# EAGLE board Buck (EAGLE 6.4)
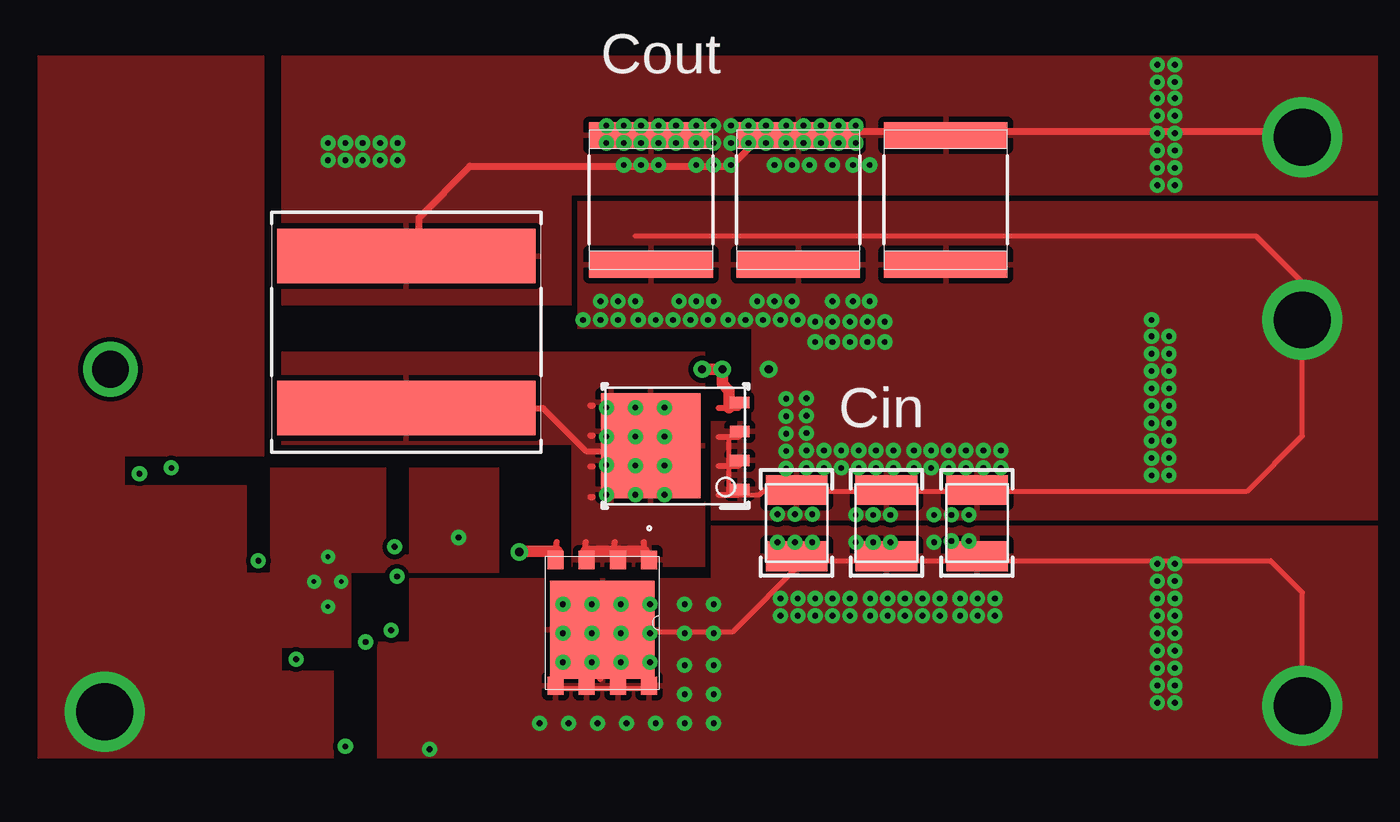
[diagram p0: board, top side]
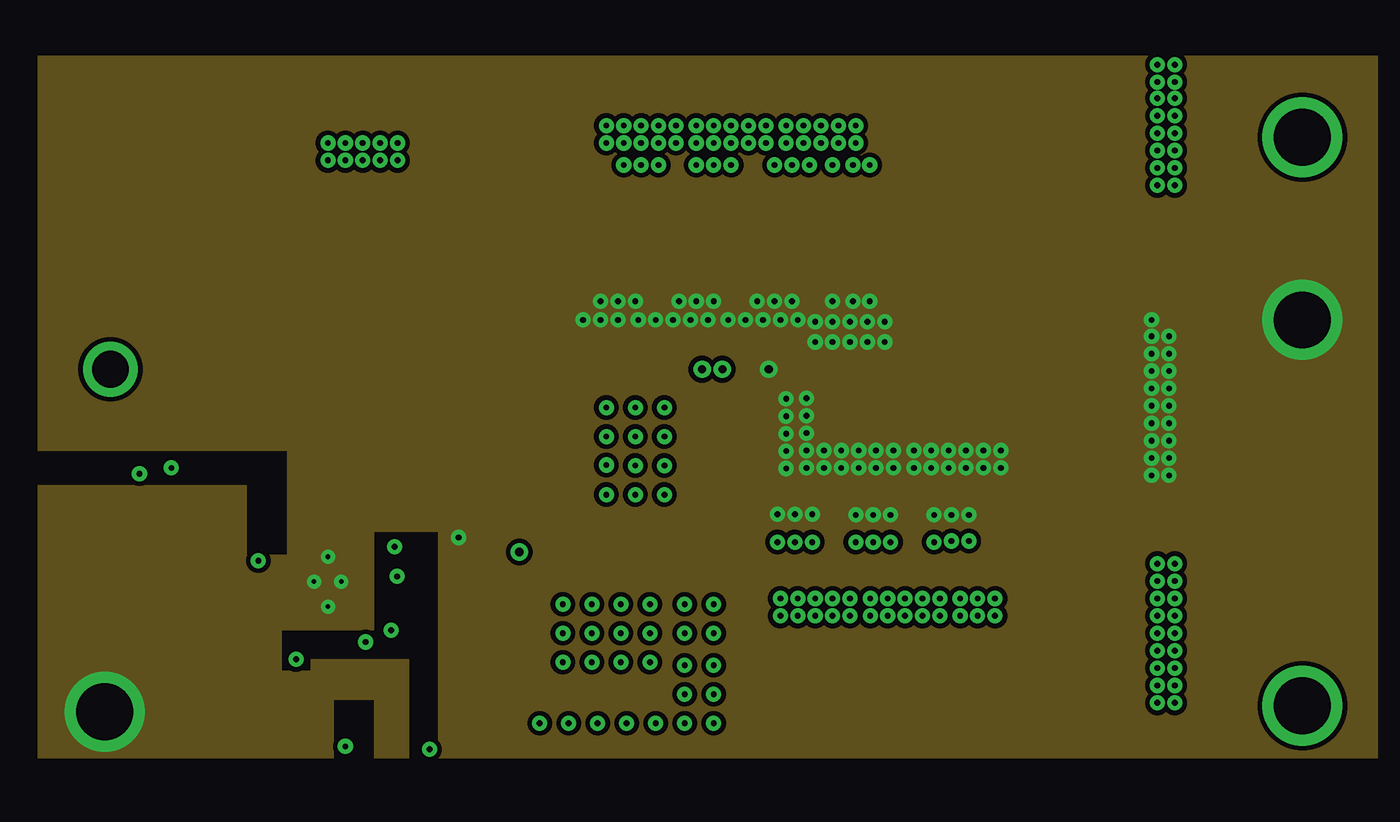
[diagram p1: board, inner layer INTERNAL1]
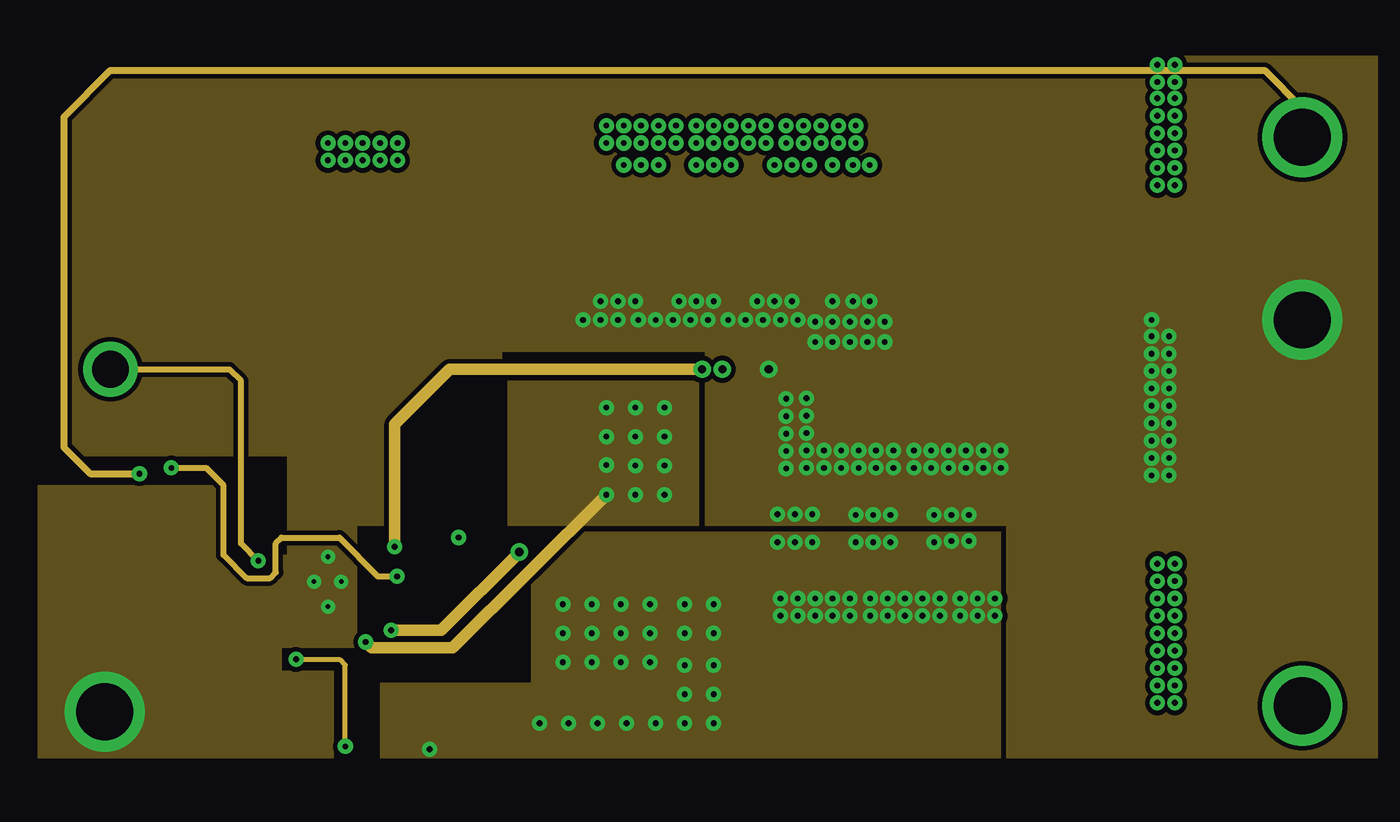
[diagram p2: board, inner layer INTERNAL2]
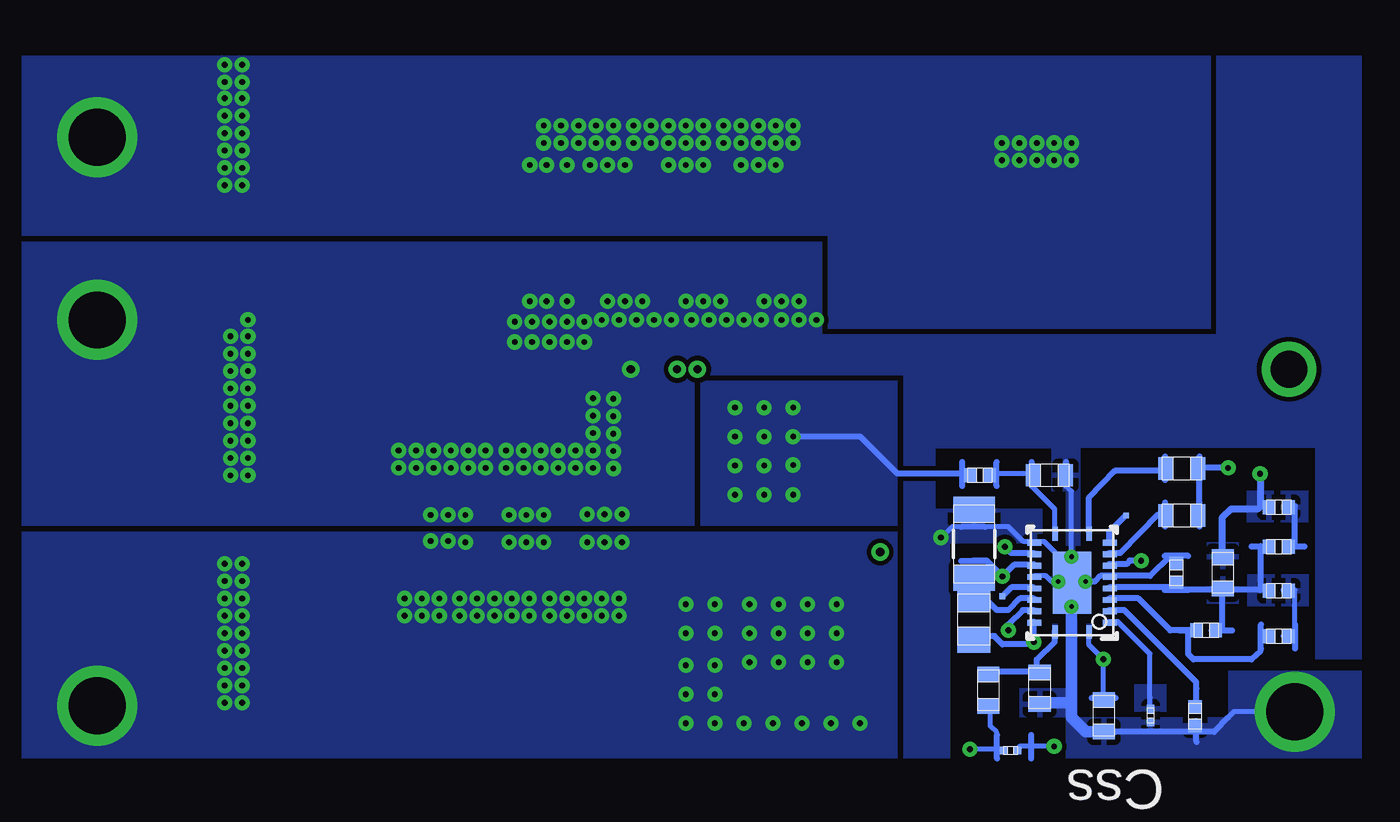
[diagram p3: board, bottom side, seen from below]

No outline drawn. Coordinates in mm, seen from the top.
Copper layers ((1*2)+(15*16)): TOP / INTERNAL1 / layer 15 / BOTTOM

## Footprints (pad centres in the part's own frame; a part is rotated, then mirrored left to right if it is on the bottom)
TP-1502 = drill 0.813 round: 1 0,0
0805 = smd 1.118 x 1.448: 1 -0.902,0; 2 0.902,0
0402 = smd 0.559 x 0.61: 1 -0.419,0; 2 0.419,0
0603 = smd 0.66 x 0.965: 1 -0.699,0; 2 0.699,0
1210 = smd 1.3 x 2.7: 1 -1.45,0; 2 1.45,0
2220_250 = smd 1.143 x 5.41: 1 -2.832,0; 2 2.832,0
1206 = smd 1.118 x 1.803: 1 -1.499,0; 2 1.499,0
XAL1010 = smd 2.388 x 11.303: 1 -3.327,0; 2 3.327,0
TRANS_NexFET_Q5A = smd 0.8 x 0.7: 1 -2.752,2.055; 2 -2.752,0.685; 3 -2.752,-0.685; 4 -2.752,-2.055; 5 2.752,-2.055; 6 2.752,-0.685; 7 2.752,0.685; 8 2.752,2.055 | smd 4.3 x 4.56: 9 0.3,0
TRANS_NexFET_Q5B = smd 0.86 x 0.51: 1 -2.82,1.905; 2 -2.82,0.635; 3 -2.82,-0.635; 4 -2.82,-1.905; 5 2.82,-1.905; 6 2.82,-0.635; 7 2.82,0.635; 8 2.82,1.905 | smd 4.34 x 4.6: 9 1.08,0
SMD_PAD1 = smd 0.254 x 0.254: 1 0,0
0201 = smd 0.356 x 0.33: 1 -0.292,0; 2 0.292,0
TP-5012 = drill 0.813 round: 1 0,0
RGY0020B = smd 0.25 x 0.6: 1 -0.75,2.15; 10 -0.75,-2.15; 11 0.75,-2.15; 20 0.75,2.15 | smd 0.6 x 0.25: 2 -1.65,1.75; 3 -1.65,1.25; 4 -1.65,0.75; 5 -1.65,0.25; 6 -1.65,-0.25; 7 -1.65,-0.75; 8 -1.65,-1.25; 9 -1.65,-1.75; 12 1.65,-1.75; 13 1.65,-1.25; 14 1.65,-0.75; 15 1.65,-0.25; 16 1.65,0.25; 17 1.65,0.75; 18 1.65,1.25; 19 1.65,1.75 | smd 1.7 x 2.7: 21 0,0

## Placement (x,y rotation side)
AGND  [TP-1502]  29.06,28.17 0 top
Cboot  [0805]  43.13,32.23 270 bottom
Ccomp1  [0402]  29.79,31.5 0 bottom
Ccomp2  [0402]  32.97,31.75 0 bottom
Ccomp3  [0402]  29.79,35.41 180 bottom
Cilim  [0603]  39.83,38.53 180 bottom
Cin_1  [1210]  59.39,36.45 90 top
Cin_2  [1210]  63.32,36.45 90 top
Cin_3  [1210]  67.28,36.45 90 top
Cout_1  [2220_250]  53.01,50.6 270 top
Cout_2  [2220_250]  59.46,50.6 270 top
Cout_3  [2220_250]  65.91,50.6 270 top
Css_1  [0402]  33.45,27.99 270 bottom
Css_2  [0402]  33.45,27.99 270 bottom
Cvcc  [1206]  43.13,35.53 90 bottom
Cvin  [0603]  40.26,29.21 270 bottom
L1  [XAL1010]  42.29,44.81 270 top
M1  [TRANS_NexFET_Q5A]  50.88,32.08 270 top
M2  [TRANS_NexFET_Q5B]  54.08,39.83 180 top
NC1  [SMD_PAD1]  36.47,36.78 90 bottom
NC2  [SMD_PAD1]  41.88,33.25 90 bottom
PGND  [TP-1502]  81.51,45.34 0 top
Rcomp1  [0402]  29.79,33.48 180 bottom
Rcomp2  [0402]  29.79,37.13 0 bottom
Rfbb  [0402]  34.26,34.26 270 bottom
Rfbt  [0603]  32.23,34.26 270 bottom
Rilim  [0402]  42.88,38.53 0 bottom
Rpgood  [0603]  34.04,38.84 180 bottom
Rt  [0201]  35.41,28.02 270 bottom
Ruv1  [0201]  41.53,26.49 0 bottom
Ruv2  [0603]  37.44,28.02 270 bottom
Rvcc  [0603]  34.04,36.78 0 bottom
Rvin  [0603]  42.49,29.13 90 bottom
SYNCOUT  [TP-5012]  29.34,43.15 0 top
U1  [RGY0020B]  38.84,33.83 180 bottom
VIN  [TP-1502]  81.51,28.45 0 top
VOUT  [TP-1502]  81.51,53.34 0 top

## Library data of the parts
AGND = ultra-librarian; RefDes: AGND; Type: TP-1502
Cboot = ultra-librarian; RefDes: Cboot; Type: 08053C104KAT2A
Ccomp1 = ultra-librarian; RefDes: Ccomp1; Type: GRM155R71C123KA01D
Ccomp2 = ultra-librarian; RefDes: Ccomp2; Type: GRM1555C1H1R0CA01D
Ccomp3 = ultra-librarian; RefDes: Ccomp3; Type: GRM1555C1H561JA01J
Cilim = ultra-librarian; RefDes: Cilim; Type: GRM1885C2A160JA01D
Cin_1-Cin_3 Cout_1-Cout_3 Css_1 Css_2 = ultra-librarian
Cvcc = ultra-librarian; RefDes: Cvcc; Type: 12063D225KAT2A
Cvin = ultra-librarian; RefDes: Cvin; Type: GRM188R72A104KA35D
L1 = ultra-librarian; RefDes: L1; Type: XAL1010-152MEB
M1 = ultra-librarian; RefDes: M1; Type: CSD18513Q5A
M2 = ultra-librarian; RefDes: M2; Type: CSD18512Q5B
NC1 = ultra-librarian; RefDes: NC1; Type: SMD_TP
NC2 = ultra-librarian; RefDes: NC2; Type: SMD_TP
PGND = ultra-librarian; RefDes: PGND; Type: TP-5012
Rcomp1 = ultra-librarian; RefDes: Rcomp1; Type: CRCW04028K66FKED
Rcomp2 = ultra-librarian; RefDes: Rcomp2; Type: CRCW04021K74FKED
Rfbb = ultra-librarian; RefDes: Rfbb; Type: CRCW04023K40FKED
Rfbt = ultra-librarian; RefDes: Rfbt; Type: RC0603FR-0718KL
Rilim = ultra-librarian; RefDes: Rilim; Type: CRCW0402365RFKED
Rpgood = ultra-librarian; RefDes: Rpgood; Type: RC0603FR-0720KL
Rt = ultra-librarian; RefDes: Rt; Type: RC0201FR-0728K7L
Ruv1 = ultra-librarian; RefDes: Ruv1; Type: RC0201FR-07105KL
Ruv2 = ultra-librarian; RefDes: Ruv2; Type: RC0603FR-077K5L
Rvcc = ultra-librarian; RefDes: Rvcc; Type: RC0603FR-0720KL
Rvin = ultra-librarian; RefDes: Rvin; Type: CRCW06032R10FKEA
SYNCOUT = ultra-librarian; RefDes: SYNCOUT; Type: TP-5012
U1 = ultra-librarian; RefDes: U1; Type: LM25145RGYR
VIN = ultra-librarian; RefDes: VIN; Type: TP-1502
VOUT = ultra-librarian; RefDes: VOUT; Type: TP-1502

## Nets
0: AGND.1 Cilim.1 Cin_1.2 Cin_2.2 Cin_3.2 Cout_1.2 Cout_2.2 Cout_3.2 Css_1.2 Css_2.2 Cvcc.2 Cvin.2 M2.1 M2.2 M2.3 PGND.1 Rfbb.1 Rt.2 Ruv2.2 U1.6 U1.12 U1.15 U1.21
1: Cvcc.1 Rpgood.1 Rvcc.2 U1.14
2: Cout_1.1 Cout_2.1 Cout_3.1 L1.1 Rcomp2.1 Rfbt.1 VOUT.1
3: Cin_1.1 Cin_2.1 Cin_3.1 M1.5 M1.6 M1.7 M1.8 M1.9 Ruv1.1 Rvin.1 VIN.1
4: Ruv1.2 Ruv2.1 U1.1
7: Css_1.1 Css_2.1 U1.3
8: Cvin.1 Rvin.2 U1.20
10: Ccomp1.1 Ccomp2.1 U1.4
11: Ccomp2.2 Ccomp3.2 Rcomp1.2 Rfbb.2 Rfbt.2 U1.5
13: Cilim.2 Rilim.2 U1.11
16: Cboot.2 L1.2 M1.1 M1.2 M1.3 M2.5 M2.6 M2.7 M2.8 M2.9 Rilim.1 U1.19
17: Ccomp1.2 Rcomp1.1
18: Ccomp3.1 Rcomp2.2
19: Rvcc.1 U1.8
21: NC2.1 U1.16
22: NC1.1 U1.9
26: Rt.1 U1.2
27: Cboot.1 U1.17
35: M1.4 U1.18
36: M2.4 U1.13
37: SYNCOUT.1 U1.7
38: Rpgood.2 U1.10

## Tracks (layer width: path | path; a pad name or v marks a point on that pad's centre or on a via)
0  (via drill 0.2 pad 0.48, 0.25 pad 0.56, 0.36 pad 0.66, 2.49 pad 3.48)
  TOP 0.229: 52.32,49.02 79.5,49.02 81.53,46.99 v81.53,45.34 81.53,40.26 79.12,37.85 60.2,37.85 57.91,37.85 57.76,37.69 56.41,37.69 56.41,38.96 56.41,40.23
  TOP 0.254: 55.98,37.68 56.82,37.68 | 55.98,38.95 56.82,38.95 | 55.98,40.22 56.82,40.22
  BOTTOM 0.229: 32,27.94 31.75,28.19 v29.08,28.19 | 38.86,34.44 v38.86,34.98 38.86,37.85 39.12,38.1 39.12,38.61 | 38.86,34.44 38.86,33.88 v38.86,32.79 | v44.58,35.81 44.07,36.3 43.18,36.3 41.63,36.3 40.97,35.64 40.51,35.64 40.06,35.64 38.86,34.44 | 40.51,34.14 39.98,34.14 39.73,33.88 v39.45,33.88 | 33.4,27.81
  BOTTOM 0.254: 37.44,27.3 33.4,27.3 32.61,27.3 32,27.94 | 34.29,35.03 34.54,35.03 35.43,34.14 37.21,34.14 37.59,34.14 37.85,33.88 v38.25,33.88 | 39.1,38.08 39.1,39.12 | 42.65,36.28 43.69,36.28 | 33.39,26.87 33.39,27.71 | 33.76,35.01 34.8,35.01 | 36.93,27.29 37.97,27.29
  BOTTOM 0.508: 37.44,27.3 38.23,27.3 38.86,27.94 38.86,28.7 | 40.39,28.57 38.96,28.57 38.86,28.7 | 38.86,28.7 v38.86,32.79
  other vias: 74.93,45.34 58.17,43.18 75.69,42.34 74.93,42.34 74.93,41.58 74.93,40.82 74.93,40.06 75.69,41.58 75.69,40.82 75.69,40.06 74.93,43.1 75.69,43.1 60.96,46.15 51.56,45.34 50.8,45.34 50.04,45.34 52.45,45.34 55.5,45.34 54.74,45.34 53.98,45.34 53.21,45.34 56.39,45.34 59.44,45.34 58.67,45.34 57.91,45.34 57.15,45.34 60.07,36.83 59.31,36.83 58.55,36.83 62.59,46.15 61.85,46.15 59.18,46.15 57.66,46.15 58.42,46.15 55.75,46.15 54.23,46.15 54.99,46.15 52.32,46.15 51.56,46.15 61.98,36.8 58.93,41.88 59.82,41.91 58.93,38.84 58.93,39.6 58.93,40.36 59.82,38.86 59.82,39.62 59.82,40.39 59.82,41.15 62.74,36.8 63.5,36.8 65.41,36.8 66.17,36.8 66.93,36.8 58.93,41.12 50.8,46.15 60.96,45.26 60.96,44.37 61.72,44.37 62.48,44.37 63.25,44.37 61.72,45.26 62.48,45.26 63.25,45.26 60.2,44.37 60.2,45.26 68.33,39.62 68.33,38.86 64.52,39.62 64.52,38.86 67.56,39.62 66.8,39.62 66.04,39.62 67.56,38.86 66.8,38.86 66.04,38.86 65.28,38.86 65.28,39.62 60.58,39.62 60.58,38.86 63.63,39.62 62.87,39.62 62.1,39.62 63.63,38.86 62.87,38.86 62.1,38.86 61.34,38.86 61.34,39.62 75.69,39.29 74.93,39.29 74.93,38.53 75.69,38.53 74.93,44.63 74.93,43.87 75.69,44.63 75.69,43.87
  pour TOP (rank 6): 26.16,56.9 36.07,56.9 36.07,39.37 29.97,39.37 29.97,38.1 32.51,38.1 35.31,38.1 35.31,34.26 36.32,34.26 36.32,38.86 41.4,38.86 41.4,35.05 42.42,35.05 42.42,38.86 46.35,38.86 46.35,34.26 39.88,34.26 39.88,30.99 36.83,30.99 36.83,29.97 39.12,29.97 39.12,26.16 26.16,26.16
  pour TOP: 49.78,50.55 49.78,44.96 57.4,44.96 57.4,40.89 55.63,40.89 55.63,36.58 84.84,36.58 84.84,50.55
  pour BOTTOM (rank 5): 40.21,35.51 40.21,35.74 40.79,35.74 40.79,35.51
  pour BOTTOM (rank 6): 40.21,34.01 40.21,34.24 40.79,34.24 40.79,34.01
  pour BOTTOM (rank 6): 36.91,34.01 36.91,34.24 37.49,34.24 37.49,34.01
  pour BOTTOM (rank 6): 46.23,26.16 44.2,26.16 44.2,35.56 41.15,35.56 40.13,35.56 40.13,37.08 44.83,37.08 44.83,39.73 39.75,39.73 39.75,37.85 39.12,37.85 39.12,35.31 39.75,35.31 39.75,32.51 37.97,32.51 37.97,35.31 38.48,35.31 38.48,39.75 28.19,39.75 28.19,30.48 26.16,30.48 26.16,56.9 32.51,56.9 32.51,44.7 49.78,44.7 49.78,48.77 84.84,48.77 84.84,36.32 55.37,36.32 55.37,42.93 46.23,42.93
  pour BOTTOM (rank 6): 38.61,27.94 38.61,32.38 39.12,32.38 39.12,29.21 41.15,29.21 41.15,27.94 39.12,27.94 39.12,26.16 26.16,26.16 26.16,29.97 32,29.97 32,27.94
  pour INTERNAL1 (rank 6): 77.47,26.16 43.69,26.16 43.69,36.07 40.89,36.07 40.89,31.75 36.83,31.75 36.83,29.97 38.1,29.97 38.1,30.48 42.42,30.48 42.42,26.16 40.89,26.16 40.89,28.7 39.12,28.7 39.12,26.16 26.16,26.16 26.16,38.1 35.31,38.1 35.31,35.05 37.08,35.05 37.08,39.62 26.16,39.62 26.16,56.9 84.84,56.9 84.84,26.16
  pour INTERNAL2 (rank 6): 26.16,56.9 84.84,56.9 84.84,26.16 68.58,26.16 68.58,36.32 55.37,36.32 55.37,43.94 46.48,43.94 46.48,36.32 40.13,36.32 40.13,30.99 36.83,30.99 36.83,29.97 39.12,29.97 39.12,26.16 26.16,26.16 26.16,38.1 34.8,38.1 34.8,35.05 37.08,35.05 37.08,39.37 26.16,39.37
1  (via drill 0.25 pad 0.56)
  INTERNAL2 0.254: v32,38.86 33.53,38.86 34.29,38.1 34.29,35.05 35.31,34.04 36.32,34.04 36.58,34.29 36.58,35.56 36.83,35.81 39.37,35.81 41.05,34.11 v41.88,34.11 41.96,34.11
  BOTTOM 0.254: v32,38.86 | v32,38.86 33.27,38.86 33.27,36.83 | 43.18,34.8 42.57,34.8 v41.88,34.11 41.38,34.62 40.51,34.62 40.51,34.65 | 33.26,36.3 33.26,37.34 | 33.26,38.33 33.26,39.37 | 42.65,34.78 43.69,34.78
  pour BOTTOM: 40.21,34.52 40.21,34.75 40.79,34.75 40.79,34.52
2  (via drill 0.25 pad 0.56, 2.49 pad 3.48)
  TOP 0.305: 42.85,48.13 42.85,49.81 45.09,52.07 52.32,52.07 54.99,52.07 56.52,52.07 58.04,53.59 59.69,53.59 61.21,53.59 81.28,53.59 v81.53,53.34
  INTERNAL2 0.305: 81.53,51.82 v81.53,53.34 81.53,54.61 79.88,56.26 29.34,56.26 27.3,54.23 27.3,39.75 28.45,38.61 v30.61,38.61
  BOTTOM 0.305: 32.26,35.03 32.26,36.7 31.88,37.06 30.71,37.06 30.58,37.19 30.58,38.58
  other vias: 38.86,53.09 38.86,52.32 41.91,53.09 41.15,53.09 40.39,53.09 41.91,52.32 41.15,52.32 40.39,52.32 39.62,52.32 39.62,53.09 75.95,52.76 75.18,52.76 75.95,56.52 75.95,51.23 75.18,56.52 75.18,51.99 75.95,51.99 60.96,52.12 62.59,52.12 61.85,52.12 59.94,52.12 59.18,52.12 58.42,52.12 51.82,52.12 52.58,52.12 53.34,52.12 54.99,52.12 56.52,52.12 55.75,52.12 75.18,55.04 75.18,54.28 75.18,53.52 75.95,55.04 75.95,54.28 75.95,53.52 75.18,55.75 75.95,55.75 51.82,53.85 51.82,53.09 52.58,53.09 53.34,53.09 54.1,53.09 52.58,53.85 53.34,53.85 54.1,53.85 51.05,53.09 51.05,53.85 55.75,53.85 55.75,53.09 56.52,53.09 57.28,53.09 58.04,53.09 56.52,53.85 57.28,53.85 58.04,53.85 54.99,53.09 54.99,53.85 59.69,53.85 59.69,53.09 60.45,53.09 61.21,53.09 61.98,53.09 60.45,53.85 61.21,53.85 61.98,53.85 58.93,53.09 58.93,53.85 75.18,51.23
  pour TOP (rank 5): 36.83,56.9 84.84,56.9 84.84,50.8 49.53,50.8 49.53,45.97 36.83,45.97
  pour BOTTOM (rank 3): 30,36.47 30,37.87 31.19,37.87 31.19,36.47
  pour BOTTOM (rank 3): 31.55,34.42 31.55,35.61 32.94,35.61 32.94,34.42
  pour BOTTOM (rank 5): 49.53,44.96 32.77,44.96 32.77,56.9 84.84,56.9 84.84,49.02 49.53,49.02
3  (via drill 0.25 pad 0.56, 2.49 pad 3.48)
  TOP 0.229: 50.8,31.7 56.59,31.7 59.69,34.8 60.2,34.8 80.14,34.8 81.53,33.4 v81.53,28.45 | 52.78,29.21 51.46,29.21 50.11,29.21 48.79,29.21
  TOP 0.254: 50.79,29.62 50.79,33.76 | 48.78,29.13 48.78,29.26 | 50.1,29.13 50.1,29.26 | 51.45,29.13 51.45,29.26 | 52.77,29.13 52.77,29.26
  BOTTOM 0.229: v43.31,26.54 42.14,26.54 42.14,26.67 42.14,27.28 42.42,27.56 42.42,28.57 | v43.31,26.54
  BOTTOM 0.254: 42.13,26.14 42.13,27.18
  other vias: 51.69,31.62 52.96,31.62 54.48,31.62 75.18,28.57 75.95,28.57 75.95,34.67 75.18,34.67 75.95,31.62 75.95,32.38 75.95,33.15 75.18,31.62 75.18,32.38 75.18,33.15 75.18,33.91 75.95,33.91 50.42,32.89 52.96,32.89 51.69,32.89 49.15,32.89 50.42,31.62 52.96,30.35 51.69,30.35 50.42,30.35 49.15,30.35 49.15,31.62 61.98,35.61 66.17,35.66 59.31,35.61 63.5,35.61 62.74,35.61 66.93,35.66 65.41,35.61 58.55,35.61 60.07,35.61 75.95,30.1 75.18,30.1 75.18,29.34 75.95,29.34 75.18,30.86 75.95,30.86 59.44,33.15 59.44,32.38 60.2,32.38 60.96,32.38 61.72,32.38 60.2,33.15 60.96,33.15 61.72,33.15 58.67,32.38 58.67,33.15 63.37,33.15 63.37,32.38 64.14,32.38 64.9,32.38 65.66,32.38 64.14,33.15 64.9,33.15 65.66,33.15 62.61,32.38 62.61,33.15 67.31,33.15 67.31,32.38 68.07,32.38 68.07,33.15 66.55,32.38 66.55,33.15 54.48,27.69 55.75,27.69 54.48,32.89 54.48,30.23 54.48,28.96 55.75,28.96 55.75,32.89 55.75,30.23 55.75,31.62 53.21,27.69 49.4,27.69 51.94,27.69 50.67,27.69 48.13,27.69
  pour TOP (rank 5): 84.84,26.16 41.02,26.16 41.02,31.24 42.42,31.24 42.42,34.04 55.63,34.04 55.63,36.32 84.84,36.32
  pour BOTTOM (rank 5): 84.84,26.16 46.48,26.16 46.48,36.07 84.84,36.07
  pour INTERNAL2 (rank 4): 68.33,26.16 41.15,26.16 41.15,29.46 47.75,29.46 47.75,36.07 68.33,36.07
4  (via drill 0.25 pad 0.56)
  INTERNAL2 0.229: 39.62,26.54 v39.62,26.67 39.62,30.23 39.37,30.48 v37.47,30.48
  BOTTOM 0.229: 41.15,26.67 40.64,26.67 v39.62,26.67 | v39.62,26.67 | 37.47,28.8 v37.47,30.48 38.1,31.11 38.1,31.73
  BOTTOM 0.254: 40.63,26.14 40.63,27.18 | 36.93,28.79 37.97,28.79
  pour BOTTOM (rank 3): 37.97,31.45 37.97,32.03 38.2,32.03 38.2,31.45
7
  BOTTOM 0.254: 33.4,28.8 33.4,29.49 36.55,32.64 37.21,32.64 | 33.39,28.37 33.39,29.21
  pour BOTTOM (rank 3): 36.91,32.51 36.91,32.74 37.49,32.74 37.49,32.51
8
  BOTTOM 0.254: 42.42,29.95 | 39.6,31.73 39.6,31.24 40.39,30.48 40.39,30.07 40.39,29.95 42.42,29.95
  pour BOTTOM (rank 2): 39.47,31.45 39.47,32.03 39.7,32.03 39.7,31.45
10
  BOTTOM 0.254: 33.27,31.75 33.76,31.75 | 33.76,31.75 34.54,31.75 35.94,33.15 37.21,33.15 | 33.76,31.75 33.76,30.71 33.53,30.48 30.99,30.48 30.58,30.86 30.58,31.5 | 33.33,31.74 34.16,31.74 | 30.57,30.96 30.57,32
  pour BOTTOM (rank 2): 36.91,33.02 36.91,33.25 37.49,33.25 37.49,33.02
11
  BOTTOM 0.254: 32.74,31.75 32.26,31.75 32.26,33.53 | 32.26,33.53 34.29,33.53 34.39,33.63 37.21,33.63 | 32.26,33.53 | 32.26,33.53 30.61,33.53 30.58,33.53 30.58,35.43 | 30.15,35.42 30.99,35.42 | 31.83,31.74 32.66,31.74 | 33.76,33.52 34.8,33.52
  pour BOTTOM (rank 2): 36.91,33.5 36.91,33.73 37.49,33.73 37.49,33.5
  pour BOTTOM (rank 3): 31.55,32.92 31.55,34.11 32.94,34.11 32.94,32.92
  pour BOTTOM (rank 4): 29.97,32.82 29.97,34.21 31.17,34.21 31.17,32.82
13
  BOTTOM 0.229: 42.16,38.61 | 42.16,38.61 40.62,38.61 40.62,38.08 39.6,37.06 39.6,36.04
  BOTTOM 0.254: 40.6,38.08 40.6,39.12 | 42.15,38.08 42.15,39.12
  pour BOTTOM: 39.47,35.74 39.47,36.32 39.7,36.32 39.7,35.74
16  (via drill 0.25 pad 0.56)
  TOP 0.254: 42.85,41.48 48.28,41.48 50.16,39.6 52.91,39.6 | 50.83,39.59 54.97,39.59 | 50.34,41.59 50.47,41.59 | 50.34,40.27 50.47,40.27 | 50.34,38.92 50.47,38.92 | 50.34,37.58 50.47,37.58 | 52.69,34.77 52.69,35.61 | 51.42,34.77 51.42,35.61 | 50.15,34.77 50.15,35.61
  TOP 0.508: 52.7,35.2 51.44,35.2 50.16,35.2
  INTERNAL2 0.508: v51.05,37.69 44.32,30.99 40.77,30.99 v40.51,31.24
  BOTTOM 0.254: 43.66,38.61 46.48,38.61 48.11,40.23 v51.05,40.23 51.18,40.23 | v40.51,31.24 40.51,32.13 | v40.51,31.24 | v40.51,31.24 40.62,31.14 41.88,31.14 42.24,31.5 43.18,31.5 | 42.65,31.48 43.69,31.48 | 43.65,38.08 43.65,39.12
  other vias: 51.05,38.99 52.32,41.5 51.05,41.5 52.32,40.23 53.59,41.5 53.59,40.23 52.32,38.96 53.59,38.96 52.32,37.69 53.59,37.69
  pour TOP (rank 5): 55.37,34.54 55.37,43.94 36.83,43.94 36.83,39.88 49.53,39.88 49.53,34.54
  pour BOTTOM: 40.21,32 40.21,32.23 40.79,32.23 40.79,32
  pour BOTTOM (rank 5): 46.48,42.67 55.12,42.67 55.12,36.32 46.48,36.32
  pour INTERNAL2 (rank 4): 46.74,42.67 55.12,42.67 55.12,36.32 46.74,36.32
17
  BOTTOM 0.229: 29.08,31.5 29.59,31.5 | 29.59,33.53 | 29.59,33.53 29.08,33.53 29.08,31.5 | 29.08,31.5
  BOTTOM 0.254: 29.07,30.96 29.07,32
  pour BOTTOM (rank 4): 28.47,32.82 28.47,34.21 29.67,34.21 29.67,32.82
18
  BOTTOM 0.254: 29.08,35.43 29.08,37.19 | 28.65,35.42 29.49,35.42
  pour BOTTOM (rank 3): 28.5,36.47 28.5,37.87 29.69,37.87 29.69,36.47
19
  BOTTOM 0.254: 34.77,36.83 35.05,36.83 36.73,35.13 37.21,35.13 | 34.76,36.3 34.76,37.34
  pour BOTTOM (rank 2): 36.91,35 36.91,35.23 37.49,35.23 37.49,35
21
  BOTTOM 0.254: 40.51,33.63 41.5,33.63 NC2.1
  pour BOTTOM: 40.21,33.5 40.21,33.73 40.79,33.73 40.79,33.5
  pour BOTTOM (rank 4): 42.01,33.25 41.99,33.25 41.99,33.27 41.99,33.3 41.96,33.32 41.96,33.32 41.94,33.35 41.91,33.35 41.88,33.35 41.88,33.38 41.86,33.35 41.83,33.35 41.81,33.35 41.78,33.32 41.78,33.32 41.76,33.3 41.76,33.27 41.76,33.25 41.76,33.25 41.76,33.22 41.76,33.2 41.76,33.17 41.78,33.15 41.78,33.15 41.81,33.12 41.83,33.12 41.86,33.12 41.88,33.12 41.88,33.12 41.91,33.12 41.94,33.12 41.96,33.15 41.96,33.15 41.99,33.17 41.99,33.2 41.99,33.22 42.01,33.25
22
  BOTTOM 0.254: 37.21,35.64 37.21,36.07 NC1.1
  pour BOTTOM (rank 2): 36.91,35.51 36.91,35.74 37.49,35.74 37.49,35.51
  pour BOTTOM (rank 4): 36.6,36.78 36.58,36.78 36.58,36.8 36.58,36.83 36.55,36.86 36.55,36.86 36.53,36.88 36.5,36.88 36.47,36.88 36.47,36.91 36.45,36.88 36.42,36.88 36.4,36.88 36.37,36.86 36.37,36.86 36.35,36.83 36.35,36.8 36.35,36.78 36.35,36.78 36.35,36.75 36.35,36.73 36.35,36.7 36.37,36.68 36.37,36.68 36.4,36.65 36.42,36.65 36.45,36.65 36.47,36.65 36.47,36.65 36.5,36.65 36.53,36.65 36.55,36.68 36.55,36.68 36.58,36.7 36.58,36.73 36.58,36.75 36.6,36.78
26
  BOTTOM 0.229: 35.43,28.27 35.43,28.8 | 35.43,28.8 | 35.43,28.8 35.43,30.73 36.83,32.13 37.21,32.13
  pour BOTTOM (rank 3): 36.91,32 36.91,32.23 37.49,32.23 37.49,32
  pour BOTTOM (rank 4): 34.72,28.19 34.72,29.39 36.12,29.39 36.12,28.19
27
  BOTTOM 0.254: 40.51,33.15 41.12,33.15 41.63,32.64 42.14,32.64 42.49,32.99 43.18,32.99 | 42.65,32.98 43.69,32.98
  pour BOTTOM: 40.21,33.02 40.21,33.25 40.79,33.25 40.79,33.02
35  (via drill 0.25 pad 0.56, 0.36 pad 0.66)
  TOP 0.254: 48.88,34.77 48.88,35.61
  TOP 0.508: v47.24,35.18 47.27,35.2 48.9,35.2
  INTERNAL2 0.508: v47.24,35.18 43.81,31.75 v41.63,31.75
  BOTTOM 0.254: 41.6,32.03 41.63,32 v41.63,31.75 | 41.6,32.03 | 41.6,32.03 41,32.64 40.51,32.64
  pour BOTTOM: 40.21,32.51 40.21,32.74 40.79,32.74 40.79,32.51
36  (via drill 0.25 pad 0.56, 0.36 pad 0.66)
  TOP 0.254: 55.98,41.49 56.82,41.49
  TOP 0.508: 56.41,41.5 56.41,42.24 56.13,42.55 v56.13,43.18 v55.24,43.18
  INTERNAL2 0.508: v41.78,35.41 41.78,40.77 44.2,43.18 v55.24,43.18
  BOTTOM 0.254: v41.78,35.41 41.5,35.13 40.51,35.13
  pour BOTTOM: 40.21,35 40.21,35.23 40.79,35.23 40.79,35
37  (via drill 0.25 pad 0.56, 1.6 pad 2.21)
  INTERNAL2 0.254: v35.81,34.8 35.05,35.56 35.05,42.67 34.54,43.18 v29.34,43.18 29.08,43.18
  BOTTOM 0.254: v35.81,34.8 36.32,34.8 36.45,34.65 37.21,34.65
  pour BOTTOM (rank 2): 36.91,34.52 36.91,34.75 37.49,34.75 37.49,34.52
38
  BOTTOM 0.254: 34.77,38.86 34.9,38.73 36.96,38.73 38.1,37.57 38.1,36.04 | 34.76,38.33 34.76,39.37
  pour BOTTOM (rank 2): 37.97,35.74 37.97,36.32 38.2,36.32 38.2,35.74

## Text on the board
ASSYNOTES: Cout | Cin
bDocu: Css